# EAGLE board Nav Switch v1 (EAGLE 6.5.0)
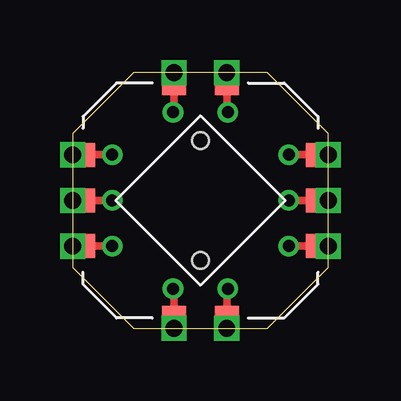
[diagram p0: board, top side]
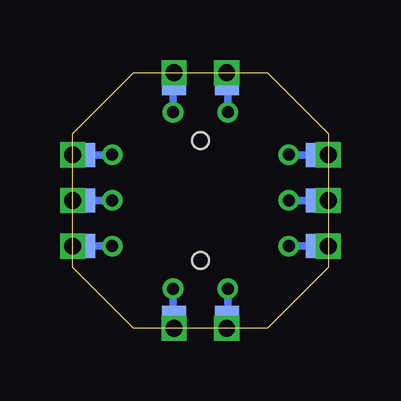
[diagram p1: board, bottom side, seen from below]

Size 10.67 x 10.67 mm. Coordinates in mm from the lower left corner, seen from the top.
Outline: 0,2.54 2.54,0 8.13,0 10.67,2.54 10.67,8.13 8.13,10.67 2.54,10.67 0,8.13 0,2.54
Copper layers (1*16): Top 0.0356mm / dielectric 1.5011mm / Bottom 0.0356mm
Design rules "LaenPCBOrder": minimum track width 6mil, minimum drill 13mil, track to track 6mil, track to pad 6mil, pad to pad 6mil, via to via 6mil, smd to smd 6mil, copper to edge 15mil, drill to drill 6mil, minimum pad ring 7mil, minimum via ring 7mil, stop-mask expansion 0mil, vias tented up to drill 25mil, thermal gap 10mil

## Footprints (pad centres in the part's own frame; a part is rotated, then mirrored left to right if it is on the bottom)
JOYSTICK-NOKIA-3230 = smd 1 x 1 rotated 315: 1 -2.121,4.808; 2 -4.808,2.121; 3 2.121,-4.808; 4 4.808,-2.121; 5 -3.465,3.465; A 2.687,4.243; B -4.243,-2.687; C -2.687,-4.243; D 4.243,2.687; E 3.465,-3.465 | hole 0.7: 1.768,1.768; -1.768,-1.768
JOYSTICK-NOKIA-3230(BACKSIDE) = smd 1 x 1 rotated 315 bottom: 1 -2.121,4.808; 2 -4.808,2.121; 3 2.121,-4.808; 4 4.808,-2.121; 5 -3.465,3.465; A 2.687,4.243; B -4.243,-2.687; C -2.687,-4.243; D 4.243,2.687; E 3.465,-3.465

## Placement (x,y rotation side)
U$1  SWITCH-NAVIGATION  [JOYSTICK-NOKIA-3230]  5.33,5.33 45 top
U$2  SWITCH-NAVIGATIONBACKSIDE  [JOYSTICK-NOKIA-3230(BACKSIDE)]  5.33,5.33 45 top

## Library data of the parts
U$1 U$2 = Jianan Li

## Nets
N$1: U$1.A U$2.A
N$2: U$1.1 U$2.1
N$3: U$1.B U$2.B
N$4: U$1.2 U$2.2
N$5: U$1.C U$2.C
N$6: U$1.3 U$2.3
N$7: U$1.D U$2.D
N$8: U$1.4 U$2.4
N$9: U$1.E U$2.E
N$10: U$1.5 U$2.5

## Tracks (layer width: path | path; a pad name or v marks a point on that pad's centre or on a via)
N$1  (via drill 0.5)
  Top 0.305: v4.19,9.02 4.23,9.02 U$2.A
  Bottom 0.305: U$2.A 4.19,10.23 v4.19,9.02
N$2  (via drill 0.5)
  Top 0.305: v1.65,7.24 U$2.1
  Bottom 0.305: U$2.1 v1.65,7.23 v1.65,7.24
N$3  (via drill 0.5)
  Top 0.305: v4.19,1.65 4.23,1.65 U$2.B
  Bottom 0.305: U$2.B 4.19,0.43 v4.19,1.65
N$4  (via drill 0.5)
  Top 0.305: U$1.2 v1.65,3.43
  Bottom 0.305: v1.65,3.43 U$1.2
N$5  (via drill 0.5)
  Top 0.305: v6.48,1.65 6.43,1.65 U$2.C
  Bottom 0.305: U$2.C 6.48,0.43 v6.48,1.65
N$6  (via drill 0.5)
  Top 0.305: v9.02,3.43 U$1.3
  Bottom 0.305: U$1.3 v9.02,3.43
N$7  (via drill 0.5)
  Top 0.305: v6.48,9.02 6.43,9.02 U$2.D
  Bottom 0.305: U$2.D 6.48,10.23 v6.48,9.02
N$8  (via drill 0.5)
  Top 0.305: v9.02,7.24 U$1.4
  Bottom 0.305: U$1.4 v9.02,7.23 v9.02,7.24
N$9  (via drill 0.5)
  Top 0.305: U$2.E v9.02,5.33 | v9.02,5.33
  Bottom 0.305: v9.02,5.33 U$2.E | U$2.E
N$10  (via drill 0.5)
  Top 0.305: v1.65,5.33 U$1.5
  Bottom 0.305: U$1.5 v1.65,5.33
N$11  (via drill 0.7)
  other vias: 0,7.24
N$12  (via drill 0.7)
  other vias: 0,5.33
N$13  (via drill 0.7)
  other vias: 0,3.43
N$14  (via drill 0.7)
  other vias: 10.67,7.24
N$15  (via drill 0.7)
  other vias: 10.67,5.33
N$16  (via drill 0.7)
  other vias: 10.67,3.43
N$17  (via drill 0.7)
  other vias: 4.23,10.67
N$18  (via drill 0.7)
  other vias: 6.43,10.67
N$19  (via drill 0.7)
  other vias: 4.23,0
N$20  (via drill 0.7)
  other vias: 6.43,0